# EAGLE board DP-webplatformv1c (EAGLE 5.07)
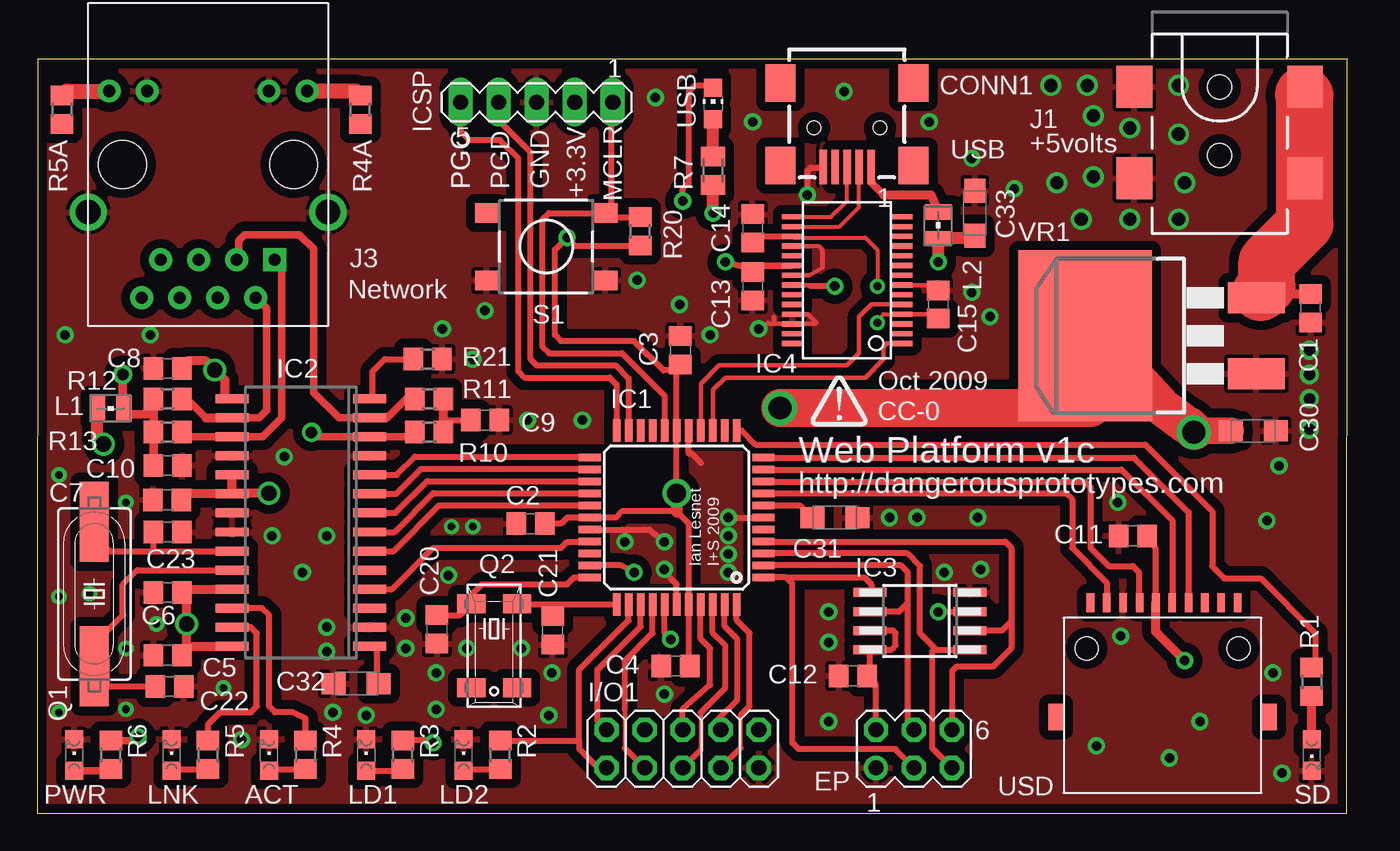
[diagram p0: board, top side]
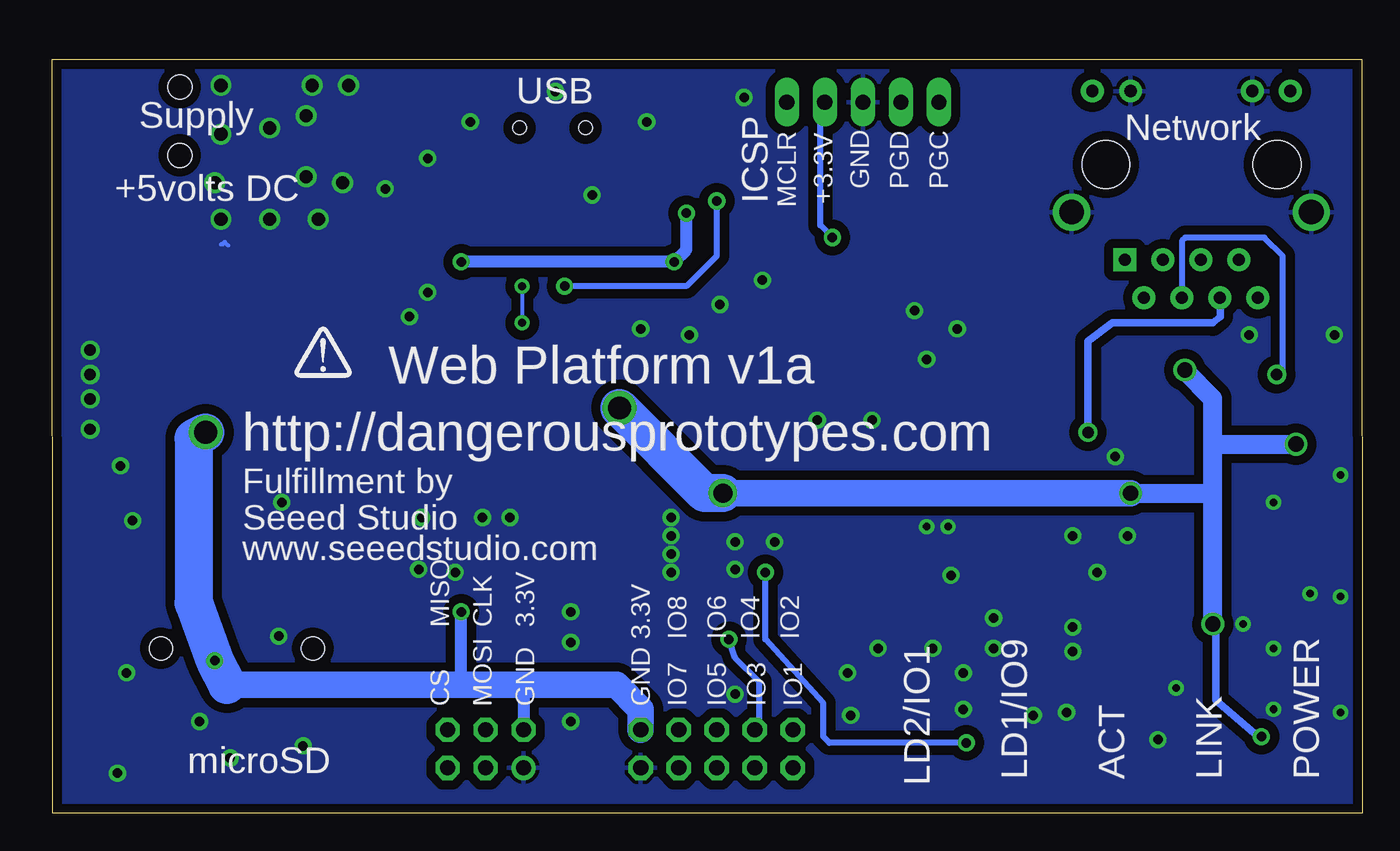
[diagram p1: board, bottom side, seen from below]

Size 87.5 x 50.33 mm. Coordinates in mm from the lower left corner, seen from the top.
Outline: 87.5,50.33 0.01,50.33 0,0 87.46,0 87.5,50.33
Copper layers (1*16): Top 0.035mm / dielectric 1.5mm / Bottom 0.035mm
Design rules "SparkFun": minimum track width 8mil, minimum drill 20mil, track to track 8mil, track to pad 8mil, pad to pad 8mil, via to via 8mil, smd to smd 8mil, copper to edge 10mil, drill to drill 8mil, minimum pad ring 12mil, minimum via ring 10mil, stop-mask expansion 4mil, vias tented up to drill 25mil, thermal gap 10mil

## Footprints (pad centres in the part's own frame; a part is rotated, then mirrored left to right if it is on the bottom)
CHIPLED_0805 = smd 1.2 x 1.2: A 0,-1.05; C 0,1.05
C0805 = smd 1.3 x 1.5: 1 -0.95,0; 2 0.95,0
SMC_A = smd 1.6 x 1.4: + -1.5,0; - 1.5,0
CONN_USB_MINI-B = smd 0.5 x 2.3: D+ 0,2.6; D- -0.8,2.6; GND 1.6,2.6; P4 0.8,2.6; VUSB -1.6,2.6 | smd 2 x 2.5: PC1 -4.45,2.5; PC2 4.45,2.5; PC3 4.45,-3; PC4 -4.45,-3 | hole 0.9: -2.2,0; 2.2,0
MA03-2 = drill 1.016 round: 1 -2.54,-1.27 | drill 1.016 octagon: 2 -2.54,1.27; 3 0,-1.27; 4 0,1.27; 5 2.54,-1.27; 6 2.54,1.27
2X05 = drill 1.016 octagon: 1 -5.08,-1.27; 2 -5.08,1.27; 3 -2.54,-1.27; 4 -2.54,1.27; 5 0,-1.27; 6 0,1.27; 7 2.54,-1.27; 8 2.54,1.27; 9 5.08,-1.27; 10 5.08,1.27
TQFP44 = smd 1.5 x 0.5: 1 -5.8,4; 2 -5.8,3.2; 3 -5.8,2.4; 4 -5.8,1.6; 5 -5.8,0.8; 6 -5.8,0; 7 -5.8,-0.8; 8 -5.8,-1.6; 9 -5.8,-2.4; 10 -5.8,-3.2; 11 -5.8,-4; 23 5.8,-4; 24 5.8,-3.2; 25 5.8,-2.4; 26 5.8,-1.6; 27 5.8,-0.8; 28 5.8,0; 29 5.8,0.8; 30 5.8,1.6; 31 5.8,2.4; 32 5.8,3.2; 33 5.8,4 | smd 0.5 x 1.5: 12 -4,-5.8; 13 -3.2,-5.8; 14 -2.4,-5.8; 15 -1.6,-5.8; 16 -0.8,-5.8; 17 0,-5.8; 18 0.8,-5.8; 19 1.6,-5.8; 20 2.4,-5.8; 21 3.2,-5.8; 22 4,-5.8; 34 4,5.8; 35 3.2,5.8; 36 2.4,5.8; 37 1.6,5.8; 38 0.8,5.8; 39 0,5.8; 40 -0.8,5.8; 41 -1.6,5.8; 42 -2.4,5.8; 43 -3.2,5.8; 44 -4,5.8
SO28W = smd 0.6 x 2.2: 1 -8.255,-4.6; 2 -6.985,-4.6; 3 -5.715,-4.6; 4 -4.445,-4.6; 5 -3.175,-4.6; 6 -1.905,-4.6; 7 -0.635,-4.6; 8 0.635,-4.6; 9 1.905,-4.6; 10 3.175,-4.6; 11 4.445,-4.6; 12 5.715,-4.6; 13 6.985,-4.6; 14 8.255,-4.6; 15 8.255,4.6; 16 6.985,4.6; 17 5.715,4.6; 18 4.445,4.6; 19 3.175,4.6; 20 1.905,4.6; 21 0.635,4.6; 22 -0.635,4.6; 23 -1.905,4.6; 24 -3.175,4.6; 25 -4.445,4.6; 26 -5.715,4.6; 27 -6.985,4.6; 28 -8.255,4.6
SO-08M = smd 0.6 x 2.2: 1 -1.905,-3.33; 2 -0.635,-3.33; 3 0.635,-3.33; 4 1.905,-3.33; 5 1.905,3.33; 6 0.635,3.33; 7 -0.635,3.33; 8 -1.905,3.33
SSOP28 = smd 0.348 x 1.397: 1 -4.225,-3.656; 2 -3.575,-3.656; 3 -2.925,-3.656; 4 -2.275,-3.656; 5 -1.625,-3.656; 6 -0.975,-3.656; 7 -0.325,-3.656; 8 0.325,-3.656; 9 0.975,-3.656; 10 1.625,-3.656; 11 2.275,-3.656; 12 2.925,-3.656; 13 3.575,-3.656; 14 4.225,-3.656; 15 4.225,3.656; 16 3.575,3.656; 17 2.925,3.656; 18 2.275,3.656; 19 1.625,3.656; 20 0.975,3.656; 21 0.325,3.656; 22 -0.325,3.656; 23 -0.975,3.656; 24 -1.625,3.656; 25 -2.275,3.656; 26 -2.925,3.656; 27 -3.575,3.656; 28 -4.225,3.656
MA05-1 = drill 1.016 long: 1 -5.08,0; 2 -2.54,0; 3 0,0; 4 2.54,0; 5 5.08,0
POWER_JACK_SMD = smd 2.8 x 2.4: GND 0,-5.7; P$4 6.1,-5.7; VIN0 0,5.7; VIN1 6.1,5.7 | hole 1.6: 0,0; 4.572,0
HR911105A = drill 0.813 pad 1.524 square: 1 4.445,-6.35 | drill 0.813 pad 1.524 round: 2 3.175,-8.89; 3 1.905,-6.35; 4 0.635,-8.89; 5 -0.635,-6.35; 6 -1.905,-8.89; 7 -3.175,-6.35; 8 -4.445,-8.89; 9 6.604,4.902; 10 4.064,4.902; 11 -4.064,4.902; 12 -6.604,4.902 | drill 1.651 pad 2.159 round: 13 8.001,-3.175; 14 -8.001,-3.175 | hole 3.2: 5.715,0; -5.715,0
WE-KI_0805_B = smd 1.02 x 1.78: 1 -0.89,0; 2 0.89,0
HC49UP = smd 5.334 x 1.93: 1 -4.826,0; 2 4.826,0
MM20SS = smd 1.27 x 1.88: 1 -2.794,-1.524; 2 2.794,-1.524; 3 2.794,1.524; 4 -2.794,1.524
R0805 = smd 1.3 x 1.5: 1 -0.95,0; 2 0.95,0
M0805 = smd 1.3 x 1.6: 1 -0.95,0; 2 0.95,0
LSH43 = smd 1.55 x 1.3: 1 -3.975,2.25; 2 3.975,2.25; 3 -3.975,-2.25; 4 3.975,-2.25
CHIP-LED0805 = smd 1.2 x 1.2: A 0,-1.05; C 0,1.05
MICROSD = smd 1.27 x 0.508: 1 0,-7.645; 2 0,-6.553; 3 0,-5.461; 4 0,-4.369; 5 0,-3.277; 6 0,-2.184; 7 0,-1.092; 8 0,0; 9 0,-8.738; 10 0,-9.83 | smd 1.778 x 1.016: RSV1 -7.62,2.286; RSV2 -7.62,-11.938 | hole 1.524: -3.048,-9.906; -3.048,0.254
D2PACK = smd 2.083 x 3.81: 1 -2.54,-8.89; 3 2.54,-8.89 | smd 11.43 x 8.89: 2 0,2.54

## Placement (x,y rotation side)
ACT  [CHIPLED_0805]  15.46,3.88 0 top
C1  0.1uF  [C0805]  85.03,33.71 270 top
C2  0.1uF  [C0805]  32.94,19.32 180 top
C3  0.1uF  [C0805]  42.95,30.91 90 top
C4  0.1uF  [C0805]  42.62,9.81 180 top
C5  0.1uF  [C0805]  8.71,10.54 180 top
C6  0.1uF  [C0805]  8.71,14.73 180 top
C7  0.1uF  [C0805]  8.68,20.91 180 top
C8  0.1uF  [C0805]  8.71,29.69 180 top
C9  0.1uF  [C0805]  29.89,26.23 0 top
C10  0.1uF  [C0805]  8.71,23.21 0 top
C11  0.1uF  [C0805]  73.17,18.51 180 top
C12  0.1uF  [C0805]  54.48,9.16 180 top
C13  0.1uF  [C0805]  47.77,35.17 270 top
C14  0.1uF  [C0805]  47.77,39.03 90 top
C15  0.1uF  [C0805]  60.17,33.95 90 top
C20  27pf  [C0805]  26.69,12.26 270 top
C21  27pf  [C0805]  34.41,12.2 270 top
C22  27pf  [C0805]  8.83,8.45 0 top
C23  27pf  [C0805]  8.71,18.77 0 top
C30  10uF  [SMC_A]  81.2,25.52 0 top
C31  10uF  [SMC_A]  53.26,19.73 0 top
C32  10uF  [SMC_A]  21.29,8.64 180 top
C33  10uF  [SMC_A]  62.61,40.05 90 top
CONN1  CONN_USB  [CONN_USB_MINI-B]  54.07,45.74 180 top
EP  [MA03-2]  58.54,4.29 0 top
I/O1  [2X05]  43.1,4.29 0 top
IC1  PIC33FJ128GP204  [TQFP44]  42.69,19.73 180 top
IC2  ENC28J60-SO  [SO28W]  17.6,19.4 90 top
IC3  25SM  [SO-08M]  58.95,12.82 90 top
IC4  FT232RL  [SSOP28]  54.07,35.58 90 top
ICSP  [MA05-1]  33.35,47.47 180 top
J1  POWER_JACKSMD  [POWER_JACK_SMD]  78.96,48.48 270 top
J3  HR911105A  [HR911105A]  11.4,43.3 0 top
L1  [WE-KI_0805_B]  4.9,27.01 0 top
L2  100mA+ ferrite bead  [WE-KI_0805_B]  60.17,39.24 90 top
LD1  [CHIPLED_0805]  21.97,3.88 0 top
LD2  [CHIPLED_0805]  28.47,3.88 0 top
LINK  [CHIPLED_0805]  8.96,3.88 0 top
PWR  [CHIPLED_0805]  2.46,3.88 0 top
Q1  25Mhz  [HC49UP]  3.81,14.63 90 top
Q2  32.768khz  [MM20SS]  30.5,11.17 270 top
R1  1K1  [R0805]  85.11,8.76 270 top
R2  1K1  [R0805]  30.91,3.88 270 top
R3  1K1  [R0805]  24.4,3.88 270 top
R4  1K1  [R0805]  17.9,3.88 270 top
R4A  1K1  [R0805]  21.56,46.96 90 top
R5  1K1  [R0805]  11.4,3.88 270 top
R5A  1K1  [R0805]  1.65,46.96 90 top
R6  1K1  [R0805]  4.9,3.88 270 top
R7  1K1  [M0805]  45.13,42.9 270 top
R10  49R9 1%  [R0805]  26.17,25.43 0 top
R11  49R9 1%  [R0805]  26.17,27.66 0 top
R12  49R9 1%  [R0805]  8.71,27.66 180 top
R13  49R9 1%  [R0805]  8.71,25.43 180 top
R20  2K  [R0805]  40.25,38.83 270 top
R21  2K32  [R0805]  26.07,30.31 180 top
S1  DTSM-6  [LSH43]  33.98,37.82 0 top
SD  [CHIPLED_0805]  85.11,3.88 180 top
U$1  [DP-LOGO]  51.63,25.83 0 top
U$2  [DP-LOGO-BOTTOM]  67.48,29.08 0 top
USB  [CHIP-LED0805]  45.13,47.37 0 top
USD  MICROSD  [MICROSD]  70.33,14.04 90 top
VR1  LD117AD2MTR  [D2PACK]  72.51,31.87 90 top

## Library data of the parts
ACT LD1 LD2 LINK PWR SD USB = led
C1-C15 C20-C23 C30-C33 R1-R4 R4A R5 R5A R6 R10-R13 R20 R21 = rcl
CONN1 IC4 U$1 = dp_devices
EP ICSP = con-lstb
I/O1 = pinhead
IC1 IC3 = microchip
IC2 = microchip-enc28j60
J1 = SparkFun
J3 = CONNECTER
L1 L2 = wuerth-elektronik
Q1 Q2 = crystal
R7 = resistor
S1 = switch-tact
U$2 = DP-logo
USD = Seeed
VR1 = v-reg

## Nets
5V+: C13.1 C33.+ IC4.20 L2.1 R7.2
$N26: CONN1.VUSB L2.2
CCT: C10.1 J3.4 L1.2 R12.2 R13.2
CTS: IC4.11
EE-CLK: EP.4 IC1.2 IC3.6
EE-CS: EP.5 IC1.3 IC3.1
EE-MISO: EP.6 IC1.4 IC3.2
EE-MOSI: EP.3 IC1.1 IC3.5
ETH-CLK: IC1.25 IC2.8
ETH-CS: IC1.24 IC2.9
ETH-INT: IC1.30 IC2.4
ETH-MISO: IC1.27 IC2.6
ETH-MOSI: IC1.26 IC2.7
ETH-RST: IC1.23 IC2.10
GND: ACT.C C1.2 C2.2 C3.2 C4.2 C5.2 C6.2 C7.2 C8.2 C9.2 C10.2 C11.2 C12.2 C13.2 C14.2 C15.2 C20.2 C21.2 C22.2 C23.2 C30.- C31.- C32.- C33.- CONN1.GND EP.1 I/O1.9 IC1.6 IC1.16 IC1.29 IC1.39 IC2.2 IC2.11 IC2.18 IC2.21 IC2.22 IC3.4 IC4.7 IC4.18 IC4.21 IC4.25 IC4.26 ICSP.3 J1.GND J1.P$4 J3.10 J3.11 J3.13 J3.14 LD1.C LD2.C LINK.C PWR.C R21.1 S1.3 S1.4 SD.C USD.6 VR1.1
LED1: IC1.32 R3.1
LED_A: IC2.27 R5.1
LED_A2: R5A.1
LED_B: IC2.26 R4.1
LED_B2: R4A.1
LED_LINK: J3.9 R4A.2
LED_STATUS: J3.12 R5A.2
MCLR: IC1.18 ICSP.1 R20.1 S1.2
N$5: C20.1 IC1.33 Q2.1
N$6: C32.+ IC2.1
N$7: IC2.14 R21.2
N$9: C22.1 IC2.24 Q1.1
N$10: R7.1 USB.A
N$11: R1.2 SD.A
N$12: C23.1 IC2.23 Q1.2
N$13: LD2.A R2.2
N$14: LINK.A R5.2
N$15: CONN1.D+ IC4.15
N$16: CONN1.D- IC4.16
N$17: C14.1 C15.1 IC4.4 IC4.17
N$18: C31.+ IC1.7
N$19: C21.1 IC1.34 Q2.4
N$20: ACT.A R4.2
N$22: C9.1 R10.2 R11.2
N$25: USD.8
N$26: IC1.31
N$28: LD1.A R3.2
N$29: PWR.A R6.2
N$34: USD.1
PGC: IC1.22 ICSP.5
PGD: IC1.21 ICSP.4
RA9: I/O1.1 IC1.35 R2.1
RB5: I/O1.6 IC1.41
RB6: I/O1.5 IC1.42
RB7: I/O1.8 IC1.43
RB8: I/O1.7 IC1.44
RC3: I/O1.2 IC1.36
RC4: I/O1.3 IC1.37
RC5: I/O1.4 IC1.38
RD+: IC2.13 J3.3 R11.1
RD-: IC2.12 J3.6 R10.1
RTS: IC4.3
RX: IC1.15 IC4.5
RXLED: IC4.22 USB.C
SDCLK: IC1.9 USD.5
SDCS: IC1.11 USD.2
SDLED: IC1.12 R1.1
SDMISO: IC1.8 USD.7
SDMOSI: IC1.10 USD.3
TD+: IC2.17 J3.1 R13.1
TD-: IC2.16 J3.2 R12.1
TX: IC1.14 IC4.1
V+: C2.1 C3.1 C4.1 C5.1 C6.1 C7.1 C8.1 C11.1 C12.1 C30.+ EP.2 I/O1.10 IC1.17 IC1.28 IC1.40 IC2.15 IC2.19 IC2.20 IC2.25 IC2.28 IC3.3 IC3.7 IC3.8 ICSP.2 L1.1 R6.1 R20.2 USD.4 VR1.2
VBAT: C1.1 J1.VIN0 VR1.3

## Tracks (layer width: path | path; a pad name or v marks a point on that pad's centre or on a via)
5V+  (via drill 0.64)
  Top 0.406: C13.1 48.27,36.56 IC4.20 46.92,36.56 v45.94,36.8
  Top 0.813: v60.17,36.8 L2.1 60.24,38.43 62.2,38.43 62.61,38.83 C33.+ | v45.13,40.05 R7.2
  Bottom 0.813: v60.17,36.8 v45.94,36.8 45.13,37.61 v45.13,40.05
$N26
  Top 0.406: 55.67,42.11 CONN1.VUSB
  Top 0.508: 55.67,42.11 56.51,41.27
  Top 0.61: 56.51,41.27 59.68,41.27 L2.2
CCT  (via drill 0.76)
  Top 0.406: R13.2 8.07,25.12 7.86,24.9
  Top 0.559: 5.71,27.86 v5.71,29.28 | 5.71,27.86 5.71,26.68 L1.2 | C10.1 R13.2 7.76,26.64 | 7.76,26.64 R12.2 | 5.71,27.86 5.71,26.64 7.76,26.64
  Bottom 0.406: J3.4 12.03,38.2 11.81,38.43 6.52,38.43 5.3,37.21 5.3,29.69 v5.71,29.28
EE-CLK
  Top 0.406: IC1.2 57.68,16.53 58.14,16.07 58.14,14.04 | EP.4 58.54,5.51 58.14,5.91 58.14,14.04 | 58.14,14.04 57.53,13.43 55.64,13.43 IC3.6
EE-CS
  Top 0.406: 60.04,10.92 IC3.1 | 60.04,10.92 58.95,12.01 58.95,16.48 58.1,17.33 IC1.3 | 61.13,3.07 EP.5 59.76,4.34 59.76,10.79 59.89,10.92 60.04,10.92
EE-MISO
  Top 0.406: IC3.2 64.41,12.19 65.04,12.82 | 65.04,12.82 65.04,17.7 64.64,18.13 IC1.4 | EP.6 61.08,9.47 61.39,9.77 63.83,9.77 65.04,10.99 65.04,12.82
EE-MOSI
  Top 0.406: IC3.5 55.57,14.73 55.7,14.85 55.7,15.26 55.23,15.73 50.01,15.73 | 50.01,15.73 IC1.1 | EP.3 57.32,4.24 57.32,4.29 50.82,4.29 50.41,4.69 50.41,15.32 50.01,15.73
ETH-CLK
  Top 0.406: IC2.8 23.9,20.04 26.03,22.17 36.85,22.17 IC1.25
ETH-CS
  Top 0.406: IC2.9 23.95,21.31 25.62,22.98 36.84,22.98 IC1.24
ETH-INT
  Top 0.406: IC2.4 23.69,14.96 26.44,17.7 34.97,17.7 35.38,18.11 36.87,18.11 IC1.30
ETH-MISO
  Top 0.406: IC2.6 23.79,17.5 26.84,20.54 36.88,20.54 IC1.27
ETH-MOSI
  Top 0.406: IC2.7 23.85,18.77 26.44,21.36 36.87,21.36 IC1.26
ETH-RST
  Top 0.406: IC2.10 24,22.58 25.22,23.8 36.83,23.8 IC1.23
GND  (via drill 0.51, 0.64, 0.76, 0.89)
  Top 0.305: IC4.7 60.11,35.26 C15.2 | 49.19,32.66 IC4.26 51.96,32.66 52.04,32.74 51.47,33.31 IC4.25 | 49.19,32.66 48.87,32.66 48.79,32.74 | 49.19,32.66 49.19,33.14 | IC4.18 52.2,37.86 52.45,37.61 52.45,36.39 51.55,35.91 IC4.21
  Top 0.406: 46.35,19.73 IC1.6 | v41.88,18.11 40.85,18.93 40.46,18.92 39.44,18.92 39.05,18.93 IC1.29 | IC1.16 43.49,24.01 43.7,24.01 44.32,23.39 | IC1.39 42.69,15.26 42.29,15.67 | v51.43,41.27 51.43,42.9 51.63,43.1 52.43,43.1 CONN1.GND
  Bottom 0.254: 76.21,37.95 76.22,37.97 76.12,37.97 75.96,38.13 75.96,38.12 75.73,37.89
  other vias: 70.53,42.49 72.97,45.74 72.97,39.64 7.54,31.92 16.48,23.79 15.67,18.51 19.32,18.51 5.91,20.75 7.95,12.62 12.42,8.35 1.85,31.92 46.15,19.73 41.88,7.95 72.16,20.75 82.11,19.53 46.15,17.29 48.18,32.33 5.91,6.93 70.73,4.49 75.61,3.68 82.52,9.37 77.64,6.12 63.62,33.14 69.72,39.64 76.22,39.64 76.63,42.08 76.22,45.33 68.09,42.08 70.53,46.55 70.12,48.59 67.69,48.59 76.22,48.59 72.36,11.81 52.85,11.4 60.57,16.07 63.01,16.28 58.75,19.73 56.92,19.73 52.85,13.43 32.74,26.23 27.05,32.33 29.08,30.3 27.45,15.87 29.08,19.12 27.66,19.12 24.61,10.99 24.61,13.03 28.67,10.99 34.36,9.37 32.33,10.99 26.64,9.37 34.16,6.52 21.97,6.52 13.63,4.9 3.47,14.65 62.4,34.77 62.4,43.71 65.25,41.68 47.77,46.15 53.87,48.18 59.56,46.15 40.05,35.58 29.89,33.55 52.85,6.12 62.81,19.73 83.13,2.66 84.96,25.62 84.96,29.28 82.93,23.19 84.96,27.66 84.96,30.91 42.9,33.95 44.93,31.92 39.24,18.11 36.39,26.23 5.91,10.99 26.64,6.93 17.7,16.07 19.32,12.42 19.32,10.79 19.73,6.73 41.88,16.28 1.44,6.73 1.44,14.45 1.44,22.58 41.27,47.77 46.15,18.51 46.15,16.07
  pour Top (isolate 0.61): 86.99,-0.18 -0.64,-0.18 -0.64,49.65 86.99,49.65
  pour Bottom (isolate 0.61): 87.4,-0.23 -0.64,-0.23 -0.64,49.65 87.4,49.65
LED1  (via drill 0.64)
  Top 0.406: IC1.32 38.98,16.53 v39.85,16.07 | v26.44,4.69 26.44,4.9 25.15,4.9 R3.1
  Bottom 0.406: v39.85,16.07 39.85,11.6 35.99,7.34 35.99,5.1 35.58,4.69 v26.44,4.69
LED_A
  Top 0.406: IC2.27 14.24,12.42 14.65,12.01 14.65,7.13 14.24,6.73 12.21,6.73 11.4,5.91 R5.1
LED_B
  Top 0.406: IC2.26 15.01,13.69 15.46,13.23 15.46,7.13 15.87,6.73 17.09,6.73 17.9,6.32 R4.1
LED_LINK
  Top 1.016: J3.9 21.26,48.2 R4A.2
LED_STATUS
  Top 1.016: J3.12 1.94,48.2 R5A.2
MCLR
  Top 0.406: 38.43,40.25 38.24,40.07 S1.2 38.24,39.78 R20.1 | ICSP.1 38.36,47.4 38.36,40.32 38.43,40.25 | IC1.18 41.89,27.85 39.03,30.7 34.16,30.7 33.75,31.11 33.75,39.64 34.16,40.05 38.22,40.05 38.43,40.25
N$5
  Top 0.406: IC1.33 35.85,15.73 35.38,15.26 29.69,15.26 28.98,14.55 Q2.1 28.22,13.21 C20.1
N$6
  Top 0.406: IC2.1 22.68,11.15 22.68,8.95 C32.+
N$7
  Top 0.406: R21.2 23.2,30.31 22.37,29.48 22.37,27.83 IC2.14
N$9
  Top 0.406: 4.62,8.61 4.62,10.51 4.45,10.37 | 4.45,10.37 Q1.1 3.8,8.35 | 3.8,8.35 3.8,8.05 3.53,8.34 3.47,8.65 3.61,8.48 | C22.1 3.91,8.45 3.8,8.35 | IC2.24 6.68,16.23 5.71,15.26 5.71,13.23 4.08,11.6 4.08,10.74 4.45,10.37
N$10
  Top 0.813: R7.1 USB.A
N$11
  Top 0.61: SD.A R1.2
N$12
  Top 0.406: Q1.2 3.64,18.13 | 3.64,18.13 4.44,18.26 | 3.64,18.13 4.8,17.53 4.39,17.5 7.74,17.5 | 7.74,17.5 IC2.23 | C23.1 7.76,17.51 7.74,17.5
N$13
  Top 0.406: R2.2 28.16,2.93 LD2.A
N$14
  Top 0.406: R5.2 9.06,2.93 LINK.A
N$15
  Top 0.254: IC4.15 53.01,39.81 54.07,40.86 CONN1.D+
N$16
  Top 0.254: IC4.16 53.58,39.16 54.88,40.46 54.88,43.23 54.87,43.22 CONN1.D-
N$17  (via drill 0.51)
  Top 0.254: IC4.4 56.51,33.31 v56.1,32.74 | v56.1,35.17 56.1,37.61 55.29,38.43 50.5,38.43 IC4.17
  Top 0.305: IC4.4 60.06,33.31 C15.1
  Top 0.406: IC4.17 48.19,38.51 C14.1
  Bottom 0.254: v56.1,35.17 v56.1,32.74
N$18
  Top 0.406: 51.23,20.14 C31.+ 50.96,20.53 IC1.7
N$19
  Top 0.406: 34.97,13.23 34.49,13.23 C21.1 34.41,13.68 34.16,13.93 | 34.16,13.93 32.06,13.93 Q2.4 | 34.16,13.93 IC1.34
N$20
  Top 0.406: R4.2 15.56,2.93 ACT.A
  Top 0.61: ACT.A 15.56,2.83
N$22
  Top 0.406: R10.2 | 27.12,27.34 R11.2 | C9.1 27.12,26.23 27.12,26.2
  Top 0.61: R10.2 27.12,26.2 27.12,27.34
N$28
  Top 0.406: LD1.A 24.3,2.83 R3.2
N$29
  Top 0.508: PWR.A 4.8,2.83 R6.2
PGC
  Top 0.406: ICSP.5 28.27,45.54 28.87,44.93 30.91,44.93 32.13,43.71 32.13,29.48 32.53,29.08 38.22,29.08 38.69,28.61 IC1.22
PGD
  Top 0.406: IC1.21 39.49,29.03 38.63,29.89 33.35,29.89 32.94,30.3 32.94,44.12 30.91,46.15 30.91,47.37 ICSP.4
RA9
  Top 0.406: I/O1.1 37.97,3.07 37.41,3.07 36.19,4.29 36.19,4.69 | 36.19,4.69 36.19,9.57 39.49,12.87 IC1.35 | R2.1 36.19,4.83 36.19,4.69
RB5
  Top 0.406: IC1.41 44.29,11.63 44.93,10.99 44.93,8.56 43.1,6.93 I/O1.6
RB6
  Top 0.305: 44.32,4.24 44.32,6.73
  Top 0.406: IC1.42 45.09,12.05 45.94,11.2 45.94,8.35 44.32,6.73 | I/O1.5 44.32,4.24
RB7
  Top 0.406: IC1.43 45.89,12.47 46.76,11.6 46.76,7.54 45.54,6.32 45.54,5.66 I/O1.8
RB8
  Top 0.305: 46.96,4.34 46.96,6.52
  Top 0.406: 45.64,2.56 I/O1.7 46.96,4.34 | IC1.44 46.69,12.89 47.57,12.01 47.57,7.13 46.96,6.52
RC3
  Top 0.406: IC1.36 40.29,12.45 37.41,9.57 37.41,6.17 I/O1.2
RC4
  Top 0.305: 39.24,4.34 39.24,6.93
  Top 0.406: IC1.37 41.09,12.04 39.24,10.18 39.24,6.93 | 39.24,4.34 I/O1.3
RC5  (via drill 0.64)
  Top 0.406: IC1.38 41.89,12 v42.29,11.6
  Bottom 0.406: v42.29,11.6 41.88,10.38 40.25,8.76 40.25,5.86 I/O1.4
RD+
  Top 0.406: 22.08,26.37 22.09,26.39 IC2.13
  Top 0.508: R11.1 24.61,27.66 23.32,26.37 22.08,26.37 | 22.09,26.39 20.14,26.39 18.46,28.06 18.46,37.66 17.5,38.63 13.84,38.63 13.43,38.22 13.43,37.08 J3.3
RD-  (via drill 0.76)
  Top 0.406: 24.9,25.12 R10.1
  Top 0.508: 24.9,25.12 IC2.12 18.61,25.12 v18.31,25.42
  Bottom 0.406: 9.47,34.49 J3.6
  Bottom 0.508: v18.31,25.42 18.31,31.52 16.68,32.74 9.98,32.74 9.47,33.14 9.47,34.49
RX
  Top 0.305: IC4.5 55.7,33.96 54.88,33.14 54.88,30.7 54.07,29.89 45.54,29.89 44.32,28.67 44.32,25.56 IC1.15
RXLED  (via drill 0.64)
  Top 0.305: IC4.22 51.96,35.26 52.04,35.17
  Top 0.406: v43.1,40.86 43.1,41.68 43.51,42.08 43.51,48.18 43.91,48.59 44.96,48.59 USB.C | v53.26,35.17 52.04,35.17 51.63,35.17
  Bottom 0.406: v43.1,40.86 43.1,37.21 45.13,35.17 v53.26,35.17
SDCLK
  Top 0.406: IC1.9 69.96,22.13 70.33,21.76 70.33,17.7 71.55,16.48 73.17,16.48 73.58,16.07 73.58,14.07 USD.5
SDCS
  Top 0.406: USD.2 76.88,20.09 73.24,23.73 IC1.11
SDLED
  Top 0.406: IC1.12 47.05,25.53 47.98,24.61 73.99,24.61 78.46,20.14 78.46,16.48 79.27,15.67 81.71,15.67 85.36,12.01 85.36,9.96 R1.1
SDMISO
  Top 0.406: USD.7 71.42,15.39 69.11,17.7 69.11,20.95 68.7,21.36 65.45,21.36 64.64,21.36 48.52,21.36 IC1.8
SDMOSI
  Top 0.406: USD.3 75.79,19.55 72.41,22.93 IC1.10
TD+
  Top 0.406: R13.1
  Top 0.508: R13.1 9.98,25.12 IC2.17 15.06,25.12 16.33,26.39 16.33,36.47 J3.1
TD-
  Top 0.508: IC2.16 14.8,26.39 15.29,26.88 15.29,33.69 J3.2 | R12.1 9.98,27.66 11.25,26.39
  Top 0.61: 11.25,26.39 IC2.16
TX
  Top 0.305: IC4.1 56.76,31.36 56.51,31.11 56.51,30.3 55.29,29.08 45.94,29.08 45.13,28.27 45.13,25.57 IC1.14
V+  (via drill 0.64, 1.02, 1.27, 1.52)
  Top 0.406: 9.98,14.96 C6.1 | 12.52,27.66 IC2.15 | 11.83,29.57 v11.84,29.58 11.85,29.56 11.88,29.56 | 9.66,29.75 C8.1 9.6,29.75 | C5.1 9.98,11.15 v9.98,12.62 | 9.98,30.2 9.98,30.12 | 12.89,21.31 12.88,21.3 | 12.89,21.31 IC2.20 13,21.36 | 12.89,21.31 13,21.42 | 9.75,21.31 9.73,21.28 9.73,21.05 9.6,20.92 9.6,20.91 C7.1 | ICSP.2 35.78,47.37 | v42.69,21.36 IC1.17 42.69,29.48 | C4.1 43.49,10.09 IC1.40 43.49,19.34 42.69,20.14 39.03,20.14 38.63,19.73 IC1.28 35.38,19.73 34.97,19.32 C2.1 | 71.14,31.52 68.84,33.01 | 70.33,27.05 70.46,26.91 | 42.69,29.48 42.69,29.7 C3.1 | USD.4 74.7,17.66 C11.1 | IC3.7 57.14,12.19 57.32,12.01 57.32,11.2 57.04,10.92 IC3.8 | IC3.3 62.02,13.46 v60.17,13.43 | IC3.8 55.54,10.99 | EP.2 56,8.59 C12.1 55.62,9.36 IC3.8 | 42.69,29.48 42.63,29.55 41.81,29.55 39.85,31.52 34.97,31.52 34.56,31.92 34.56,37.61 v35.38,38.43 35.92,37.88 R20.2
  Top 0.508: R6.1 6.25,4.83 v6.73,5.1
  Top 0.61: IC2.25 9.98,14.96 v9.98,12.62 | IC2.28 9.98,11.15 9.98,12.42 | 9.66,29.75 9.48,29.92 | 12.52,27.66 12.52,28.93 11.88,29.56 11.25,30.2 9.98,30.2 | 9.98,30.12 9.6,29.75 | 13,21.42 IC2.19 | IC2.20 9.75,21.31 | v15.46,21.36 13,21.36 | USD.4 74.7,12.11 v76.63,10.18
  Top 0.813: v42.69,21.36 42.69,20.14 | L1.1 4.01,25.04 v4.41,24.63
  Top 1.778: 71.14,31.52 VR1.2 | 70.33,27.05 75.2,27.05 | 76.73,25.93 77.24,25.52 77.54,25.52 v77.24,25.42 77.74,25.52 C30.+
  Top 2.54: 76.73,25.93 75.2,27.05 71.14,31.52 | 77.24,25.52 76.9,25.86 | v49.6,27.05 70.33,27.05
  Bottom 0.406: 10.01,21.34 9.98,21.31 | 9.98,22.24 9.94,24.63 | 15.06,21.31 v15.46,21.36 | v35.38,38.43 36.19,39.24 36.19,47.16 ICSP.2 | 56.92,8.56 60.17,8.76 59.76,8.56
  Bottom 0.508: v6.73,5.1 6.93,5.1 9.77,7.54 9.77,12.42 v9.98,12.62
  Bottom 0.813: EP.2 56,8.45 53.67,8.56 | 60.17,8.76 v60.17,13.43
  Bottom 1.27: v9.98,12.62 9.98,21.31 | 9.98,21.31 9.98,22.24 9.98,27.68 v11.84,29.58 | 9.94,24.63 v4.41,24.63 | 9.98,21.31 15.06,21.31
  Bottom 1.778: v15.46,21.36 v42.69,21.36 | I/O1.10 48.18,6.93 49.8,8.56 53.67,8.56 56.92,8.56 75.81,8.56
  Bottom 2.54: v49.6,27.05 43.91,21.36 v42.69,21.36 | v77.24,25.42 78.05,25.01 78.05,14.04 v76.63,10.18 75.81,8.56
VBAT
  Top 0.61: C1.1 81.65,34.66 VR1.3
  Top 1.016: 84.55,47.98 84.55,48.37 J1.VIN0
  Top 1.778: VR1.3 81.41,34.42
  Top 2.54: 81.71,34.77 81.71,34.72 VR1.3
  Top 3.81: 81.71,34.77 82.11,35.17 82.11,36.8 84.66,39.35 84.66,47.86 84.55,47.98

## Text on the board
tNames: USB | J1 | USB | +5volts | PGC | PGC | PGD | GND | +3.3V | MCLR | Network | Oct 2009 | CC-0 | Web Platform v1c | http://dangerousprototypes.com | Ian Lesnet | I+S 2009 | PWR | LNK | ACT | LD1 | LD2 | SD
bNames: USB | ICSP | Supply | Network | PGC | PGD | GND | +3.3V | MCLR | +5volts DC | Web Platform v1a | http://dangerousprototypes.com | Fulfillment by | Seeed Studio | www.seeedstudio.com | 3.3V | CLK | MISO | IO2 | IO4 | IO6 | IO8 | 3.3V | IO1 | IO3 | IO5 | IO7 | GND | GND | MOSI | CS | microSD | POWER | LINK | ACT | LD1/IO9 | LD2/IO1
tValues: RA0 | RA1 | GND | V+ | GND | RB15 | MCLR | V+ | GND | PGD3 | PGC3
Reference: ICSP | Supply | Network | +5volts DC | USB | PGC | PGD | GND | MCLR | +3.3V | WEB PLATFORM | CC-0 | Ian Lesnet 2009 | http://dangerousprototypes.com | microSD | Indicator LEDs